# Altium PCB Main.PcbDoc
Units mm, origin at the board's own origin, x right, y up, seen from the top; angles counter-clockwise.
Board outline 85.09 x 30.35 mm, 2 copper layers (Top Layer, Bottom Layer); 27 components, 15 nets, 80 pads, 2 vias.
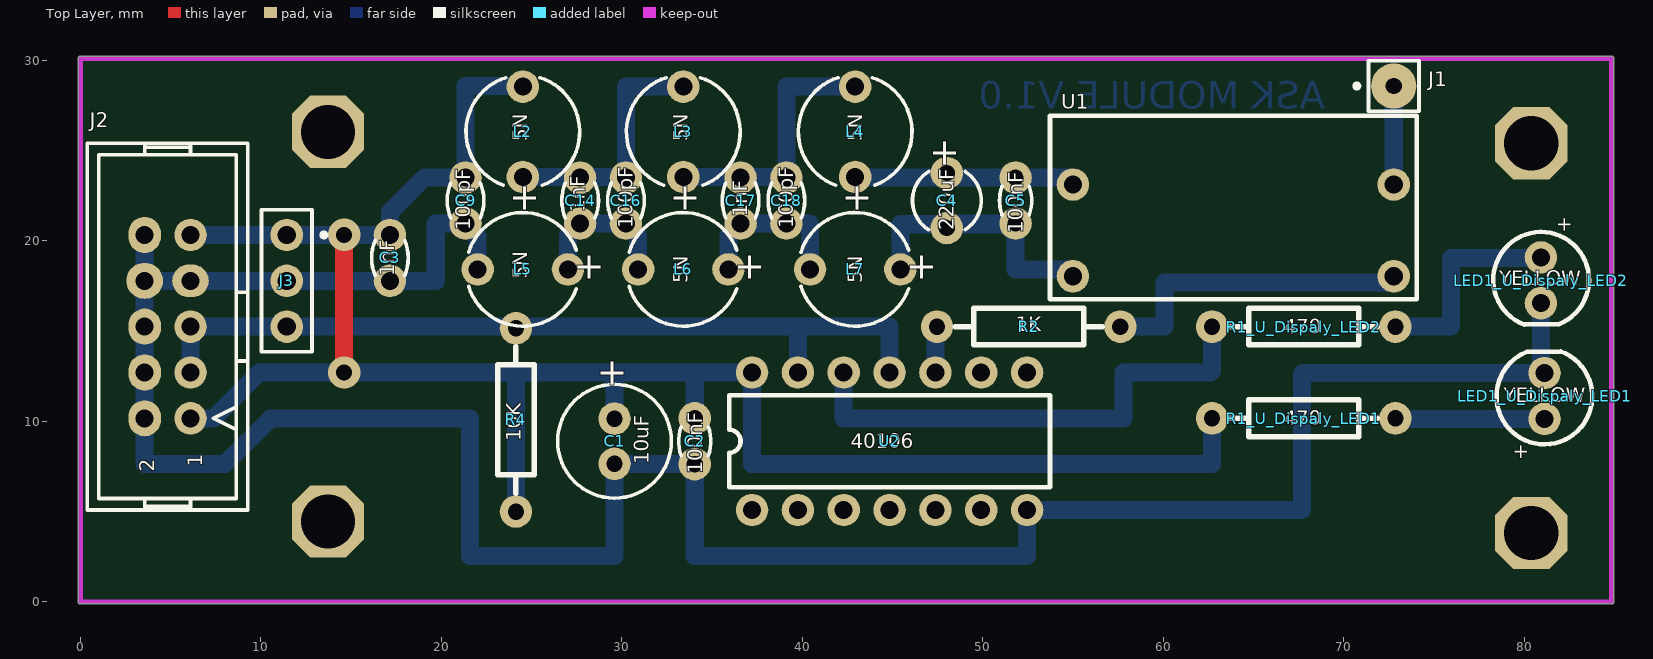
[diagram p0: Top Layer view]
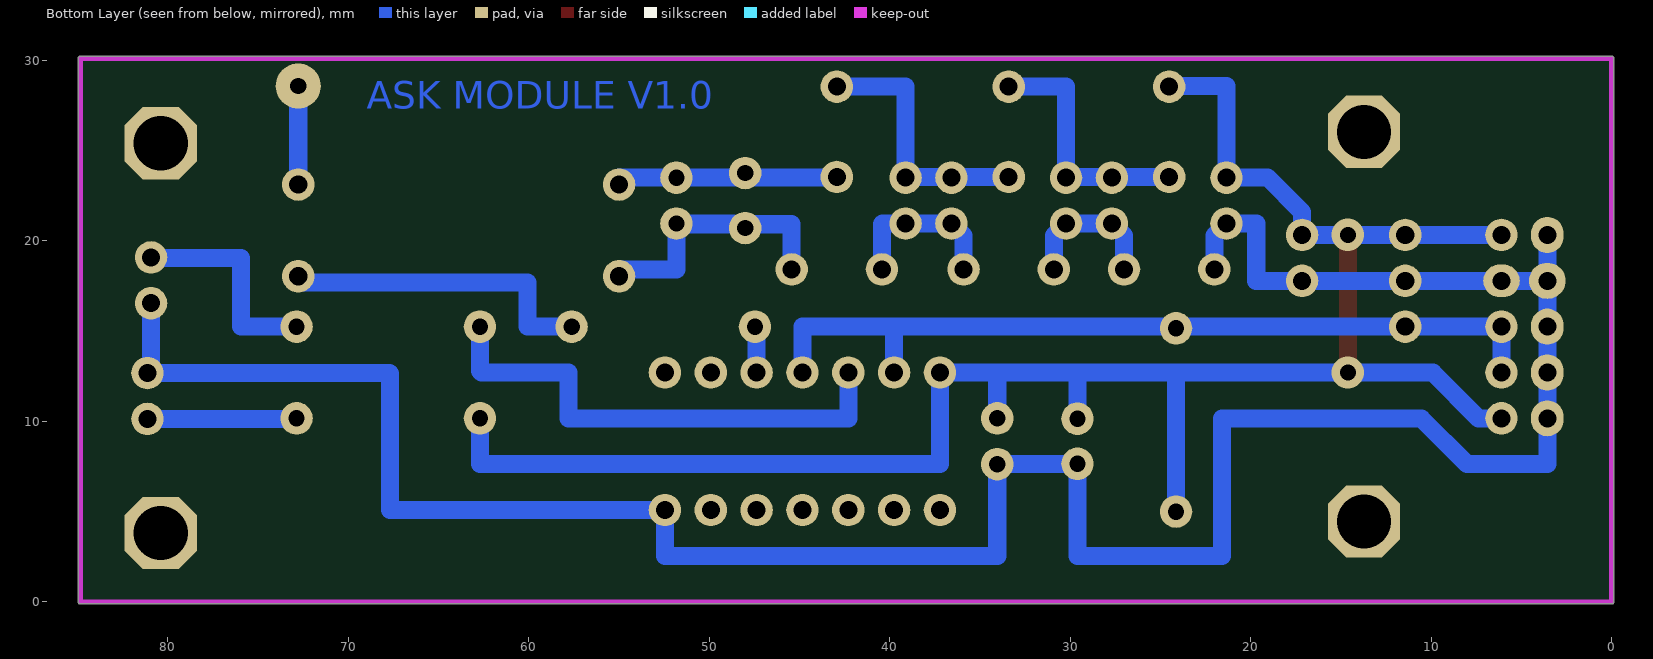
[diagram p1: Bottom Layer view, seen from below]

## Layer stack, top to bottom
Top Solder: solder mask 0.0102, Solder Resist, Dk 3.5
Top Layer: signal copper 0.0356
Dielectric 1: dielectric 0.32, FR-4, Dk 4.8
Bottom Layer: signal copper 0.0356
Bottom Solder: solder mask 0.0102, Solder Resist, Dk 3.5

## Board outline
0,-0.127 cw(c0,0) -0.127,0 -0.127,30.099 cw(c0,30.099) 0,30.226 84.836,30.226 cw(c84.836,30.099) 84.963,30.099 84.963,0 cw(c84.836,0) 84.836,-0.127

## Design rules (kind name [scope] priority, off if disabled: settings)
Clearance [All] p1: gap=0.3
ComponentClearance [All] p1 off: gap=0 collisioncheckmode=3 verticalgap=0 showdistances=FALSE
Height [All] p1: minheight=0 maxheight=50 prefheight=12.7
PolygonConnect [All] p1: connectstyle=Relief reliefconductorwidth=0.254 reliefentries=4 polygonreliefangle="90 Angle" airgapwidth=0.254
RoomDefinition U_Dispaly_LED2 [InComponentClass('U_Dispaly_LED2')] p1: confinementstyle=ConfineIn formatcopy=TRUE lockcomponents=FALSE outline -18.669,-32.385 32.131,-32.385 32.131,-6.985 -18.669,-6.985
RoomDefinition U_Dispaly_LED1 [InComponentClass('U_Dispaly_LED1')] p2: confinementstyle=ConfineIn formatcopy=TRUE lockcomponents=FALSE outline -18.669,-32.385 32.131,-32.385 32.131,-6.985 -18.669,-6.985
RoomDefinition "U_RF Module_ASK_Transfer." [InComponentClass('U_RF Module_ASK_Transfer.')] p3: confinementstyle=ConfineIn formatcopy=TRUE lockcomponents=FALSE outline 108.839,29.083 140.335,29.083 140.335,52.451 108.839,52.451
RoomDefinition Main [InComponentClass('Main')] p4: confinementstyle=ConfineIn formatcopy=TRUE lockcomponents=FALSE outline 108.839,-4.445 133.223,-4.445 133.223,16.383 108.839,16.383
RoomDefinition U_Filter [InComponentClass('U_Filter')] p5: confinementstyle=ConfineIn formatcopy=TRUE lockcomponents=FALSE outline 90.551,29.21 105.791,29.21 105.791,60.325 90.551,60.325
RoutingVias [All] p1: holewidth=0.711 width=1.27 viastyle="Through Hole" minholewidth=0.711 minwidth=1.27 maxholewidth=0.711 maxwidth=1.27
SolderMaskExpansion [All] p1: expansion=0.102
Width [All] p1: maxlimit=1 minlimit=0.3 preferedwidth=0.5
28 further rules are at their usual default settings.

## Classes and differential pairs
component class U_Filter: C3 C9 C14 C16 C17 C18 L2 L3 L4 L5 L6 L7
component class Main: C1 C2 J2 J3 U2
component class U_Dispaly_LED2: LED1_U_Dispaly_LED2 R1_U_Dispaly_LED2
component class "U_RF Module_ASK_Transfer.": C4 C5 J1 R2 U1
component class U_Dispaly_LED1: LED1_U_Dispaly_LED1 R1_U_Dispaly_LED1
channel class Dispaly_LED: U_Dispaly_LED1 U_Dispaly_LED2

## Components (designator, comment, footprint, x,y, rotation, side; value= is the part's Value field where it differs from the comment)
C1 "10uF" CAPPR2.5-6.3x5 29.591,8.89 r270 top
C2 "100nF" CAPNTO2.54-3.05x1.78A 34.036,8.89 r90 top
C3 "1nF" CAPNTO2.54-3.56x2.03 17.145,19.05 r90 top
C4 "220uF" CAPPR3.05-3.81x6.35 48.006,22.225 r270 top
C5 "100nF" CAPNTO2.54-3.05x1.78A 51.816,22.225 r90 top
C9 "100pF" CAPNTO2.54-3.56x2.03 21.336,22.225 r90 top
C14 "1nF" CAPNTO2.54-3.56x2.03 27.686,22.225 r90 top
C16 "100pF" CAPNTO2.54-3.56x2.03 30.226,22.225 r90 top
C17 "1nF" CAPNTO2.54-3.56x2.03 36.576,22.225 r90 top
C18 "100pF" CAPNTO2.54-3.56x2.03 39.116,22.225 r90 top
J1 "COAX-M" PIN1 72.771,28.575 r90 top
J2 "Header 5X2" FKV10SN 4.826,15.24 r90 top
J3 "3PIN" PIN3 11.43,20.32 r270 top
L2 "5N" CAPPR5-6.3x11 24.511,26.035 r90 top
L3 "5N" CAPPR5-6.3x11 33.401,26.035 r90 top
L4 "5N" CAPPR5-6.3x11 42.926,26.035 r90 top
L5 "5N" CAPPR5-6.3x11 24.511,18.415 r180 top
L6 "5N" CAPPR5-6.3x11 33.401,18.415 r180 top
L7 "5N" CAPPR5-6.3x11 42.926,18.415 r180 top
LED1_U_Dispaly_LED1 "YELLOW" LED-5mm_Red 81.026,11.43 r90 top (schematic designator LED1)
LED1_U_Dispaly_LED2 "YELLOW" LED-5mm_Red 81.026,17.78 r270 top (schematic designator LED1)
R1_U_Dispaly_LED1 "470" AXIAL-0.4 68.961,10.16 r180 top (schematic designator R1)
R1_U_Dispaly_LED2 "470" AXIAL-0.4 68.961,15.24 r180 top (schematic designator R1)
R2 "1K" AXIAL-0.4 53.721,15.24 r180 top
R4 "10K" AXIAL-0.4 24.13,8.89 r90 top
U1 "TX_13952" RF_ASK_TX_13952 63.881,20.32 r0 top
U2 "40106" DIP14 44.831,8.89 r90 top

## Footprints (in the part's own frame and the unit in brackets; to place one, negate y for a bottom-side part, rotate by r counter-clockwise, add the part's x,y. Pads: shape width x height; smd on the part's side, far side on the other; paste and mask are expansions set on the pad)
AXIAL-0.4 [mm]
  round 1.8 hole 0.9: 1(-3.9,0) 2(6.26,0)
  silkscreen extent -2.88,-1.02 5.24,1.02, body extent -4.19,-1.19 6.58,1.12, height 3.51
CAPNTO2.54-3.05x1.78A [mm] "Capacitor, Radial, Tantalum, Non-Polarised; Body 3.05 x 1.78 x 3.43 mm (WxTxH max); Pin Spacing 2.54 mm (typ)"
  round 1.8 hole 0.9: 1(-1.27,0) 2(1.27,0)
  silkscreen extent -0.8,-0.89 0.8,0.89
CAPNTO2.54-3.56x2.03 [mm] "Capacitor, Radial, Tantalum, Non-Polarised; Body 3.56 x 2.03 x 5.08 mm (WxTxH max); Pin Spacing 2.54 mm (typ)"
  round 1.8 hole 1: 1(-1.27,0) 2(1.27,0)
  silkscreen extent -0.98,-1.02 0.98,1.02
CAPPR2.5-6.3x5 [mm] "Capacitor, Electrolytic, Radial; Body 6.3 x 5 mm (Dia.xH typ); Pin Spacing 2.5 mm (typ)"
  round 1.8 hole 0.9: 1(-1.25,0) 2(1.25,0)
  silkscreen extent -3.15,-3.15 3.15,3.15
CAPPR3.05-3.81x6.35 [mm] "Capacitor, Radial, Tantalum; Body 3.81 x 6.35 mm (Dia.xH max); Pin Spacing 3.05 mm (typ)"
  round 1.8 hole 0.9: 1(-1.525,0) 2(1.525,0)
  silkscreen extent -1.62,-1.9 1.62,1.9
CAPPR5-6.3x11 [mm] "Capacitor, Electrolytic, Radial; Body 6.3 x 11 mm (Dia.xH typ); Pin Spacing 5 mm (typ)"
  round 1.8 hole 1: 1(-2.5,0) 2(2.5,0)
  silkscreen extent -2.96,-3.15 3,3.15
DIP14 [mm]
  round 1.8 hole 1: 1(-3.81,7.62) 2(-3.81,5.08) 3(-3.81,2.54) 4(-3.81,0) 5(-3.81,-2.54) 6(-3.81,-5.08) 7(-3.81,-7.62) 8(3.81,-7.62) 9(3.81,-5.08) 10(3.81,-2.54) 11(3.81,0) 12(3.81,2.54) 13(3.81,5.08) 14(3.81,7.62)
  silkscreen extent -2.54,-8.89 2.54,8.89
FKV10SN [mm]
  round 1.8 hole 1: 1(-5.08,-1.27) 3(-2.54,-1.27) 5(0,-1.27) 9(5.08,-1.27)
  oval 2x1.8 hole 1: 2(-5.08,1.27) 4(-2.54,1.27) 6(0,1.27) 10(5.08,1.27)
  oval 1.8x2.032 hole 1: 7(2.54,-1.27)
  oval 2x2.032 hole 1: 8(2.54,1.27)
  silkscreen extent -10.16,-4.45 10.16,4.45
LED-5mm_Red [mm]
  round 1.8 hole 1: 1(-1.3,-0.1) 2(1.24,-0.1)
  silkscreen extent -2.71,-2.74 2.43,2.56, body extent -2.6,-2.64 2.48,2.46, height 9.6
PIN1 [mm]
  round 2.5 hole 0.9: 1(0,0)
  silkscreen extent -1.4,-1.4 1.4,2.17
PIN3 [mm]
  round 1.8 hole 1: 1(0,0) 2(2.54,0) 3(5.08,0)
  silkscreen extent -1.4,-1.4 6.48,2.18
RF_ASK_TX_13952 [mm]
  round 1.8 hole 1: 1(-8.89,-2.286) 2(-8.89,2.794) 3(8.89,-2.286) 4(8.89,2.794)
  silkscreen extent -10.16,-3.56 10.16,6.6

## Part data
C1 C4: library part "Cap Pol1", "Polarized Capacitor (Radial)"
C2 C3 C5 C9 C14 C16 C17 C18: library part Cap, "Capacitor"
J1: "Coax-M Connector"
J2: "Header, 5-Pin, Dual row"
J3: library part "Header 3H", "Header, 3-Pin,  Right Angle"
L2 L3 L4 L5 L6 L7: library part Inductor, "Inductor"
LED1_U_Dispaly_LED1 LED1_U_Dispaly_LED2: library part LED, "Typical INFRARED GaAs LED"
R1_U_Dispaly_LED1 R1_U_Dispaly_LED2 R2 R4: library part Res1, "Resistor"
U1: library part RF_ASK_TX_13952_2, "Voltage Regulator"
U2: "Hex inverting Schmitt trigger, 14-Pin"

## Free pads (board coordinates)
  oct 4x4 hole 3: 0(13.716,4.445) 0(13.716,26.035) 0(80.391,3.81) 0(80.391,25.4)

## Via types
v1: diameter 1.8, hole 0.9, Top Layer to Bottom Layer, 2 vias

## Nets (pads, with @x,y where several pads share a name; then routed paths per layer and width w, separated by ;. In a path a pad name is that pad's centre, name@x,y a point inside that pad or via, vN(x,y) a via of type N, cw(c..) or ccw(c..) an arc to the next point about the centre after c; other vN are vias at no path point)
+5V: C1.1 C2.2 C3.2 C9.2 J2.1 J2.9 J3.1 L2.2 R1_U_Dispaly_LED1.2 R4.1 U2.14 | length 111.3
  Top Layer w1: v1(14.605,12.7) v1(14.605,20.32)
  Bottom Layer w1: J2.1 7.366,10.16 9.906,12.7 v1(14.605,12.7) 29.591,12.7 ; J2.9 C3.2 17.145,21.59 19.05,23.495 C9.2 21.336,28.575 24.471,28.575 L2.2 ; R4.1 24.13,12.7 ; C1.1 29.591,12.7 ; C2.2 34.036,12.7 ; R1_U_Dispaly_LED1.2 62.701,7.62 37.211,7.62 U2.14 34.036,12.7 ; 29.591,12.7 34.036,12.7
GND: C1.2 C2.1 C3.1 C9.1 J2.2 J2.4 J2.6 J2.7 J2.8 J2.10 J3.2 L5.2 LED1_U_Dispaly_LED1.2 LED1_U_Dispaly_LED2.2 U2.7 | length 146.7
  Bottom Layer w1: J2.10 J2.8 ; L5.2 22.011,20.28 C9.1 19.685,20.955 19.685,17.78 J2.7 J2.8 ; C2.1@34.016,7.64 C1.2 29.591,2.54 21.59,2.54 21.59,10.16 10.541,10.16 8.001,7.62 3.556,7.62 J2.2 J2.4 J2.6 J2.8 ; C2.1 34.036,2.54 52.451,2.54 U2.7 67.691,5.08 67.691,12.64 67.721,12.67 LED1_U_Dispaly_LED1.2 ; LED1_U_Dispaly_LED1.2@80.926,12.87 LED1_U_Dispaly_LED2.2
NetC4_1: C4.1 C5.2 L4.1 U1.2 | length 12.5
  Bottom Layer w1: L4.1 42.966,23.495 C5.2 54.991,23.495 U1.2
NetC4_2: C4.2 C5.1 L7.1 U1.1 | length 18.2
  Bottom Layer w1: L7.1 45.426,20.915 51.776,20.915 C5.1 ; C4.2@48.641,20.955 C5.1 ; U1.1 54.991,18.415 51.816,18.415 C5.1
NetC14_1: C14.1 C16.1 L5.1 L6.2 | length 8.2
  Bottom Layer w1: L5.1 27.011,20.28 C14.1 C16.1 30.901,20.28 L6.2
NetC14_2: C14.2 C16.2 L2.1 L3.2 | length 13.9
  Bottom Layer w1: L2.1 30.186,23.535 C16.2 30.226,28.535 L3.2
NetC17_1: C17.1 C18.1 L6.1 L7.2 | length 9.2
  Bottom Layer w1: L6.1 35.901,20.28 C17.1 C18.1 40.386,20.955 40.426,20.915 L7.2
NetC17_2: C17.2 C18.2 L3.1 L4.2 | length 14.5
  Bottom Layer w1: L3.1 39.076,23.535 39.116,23.575 39.116,28.535 L4.2
NetJ1_1: J1.1 U1.4 | length 5.5
  Bottom Layer w1: U1.4 J1.1
NetLED1_U_Dispaly_LED1_1: LED1_U_Dispaly_LED1.1 R1_U_Dispaly_LED1.1 | length 8.2
  Bottom Layer w1: R1_U_Dispaly_LED1.1@72.891,10.13 LED1_U_Dispaly_LED1.1
NetLED1_U_Dispaly_LED2_1: LED1_U_Dispaly_LED2.1 R1_U_Dispaly_LED2.1 | length 11.8
  Bottom Layer w1: R1_U_Dispaly_LED2.1 75.946,15.24 75.946,19.05 LED1_U_Dispaly_LED2.1@80.896,19.05
NetR1_U_Dispaly_LED2_2: R1_U_Dispaly_LED2.2 U2.12 | length 28
  Bottom Layer w1: U2.12 42.291,10.16 57.785,10.16 57.785,12.7 62.611,12.7 62.701,12.79 R1_U_Dispaly_LED2.2
NetR2_1: R2.1 U1.3 | length 17.3
  Bottom Layer w1: R2.1 60.071,15.24 60.071,17.69 U1.3@72.427,17.69
NetR2_2: R2.2 U2.10 | length 2.5
  Bottom Layer w1: U2.10 R2.2@47.371,15.24
RX: J2.3 J2.5 J3.3 R4.2 U2.11 U2.13 | length 46.4
  Bottom Layer w1: J2.3 J2.5 39.751,15.24 ; U2.13 39.751,15.24 ; U2.11 44.831,15.24 39.751,15.24
pads on no net: U2.1 U2.2 U2.3 U2.4 U2.5 U2.6 U2.8 U2.9

## Keep-outs
Keep-Out Layer:
  lines w0.254: 0,0 84.836,0 84.836,30.099 0,30.099 0,0

## Other copper
Bottom Layer:
  text "ASK MODULE V1.0" at 68.961,27.305 h1.52

## Text inside footprints (layer, text, board x,y; h text height)
C1: Top Overlay "+" at 28.841,13.515 h1.5 r270
C4: Top Overlay "+" at 47.256,25.7 h1.5 r270
J2: Top Overlay "2" at 4.089,7.188 h0.8 r90; Top Overlay "1" at 6.756,7.468 h0.8 r90
L2: Top Overlay "+" at 25.261,21.485 h1.5 r90
L3: Top Overlay "+" at 34.151,21.485 h1.5 r90
L4: Top Overlay "+" at 43.676,21.485 h1.5 r90
L5: Top Overlay "+" at 29.061,19.165 h1.5 r180
L6: Top Overlay "+" at 37.951,19.165 h1.5 r180
L7: Top Overlay "+" at 47.476,19.165 h1.5 r180
LED1_U_Dispaly_LED1: Top Overlay "+" at 80.161,7.844 h0.8 r90
LED1_U_Dispaly_LED2: Top Overlay "+" at 81.891,21.366 h0.8 r270